# Altium PCB ee453_pcb_KangTouraj.PcbDoc (part 2 of 2)
Units mil, origin at the board's own origin, x right, y up, seen from the top; angles counter-clockwise.
Board outline 6000 x 5000 mil, 4 copper layers (Top Layer, PWR, GND, Bottom Layer), stack 53.912 mil thick; 92 components, 61 nets, 368 pads, 47 vias.
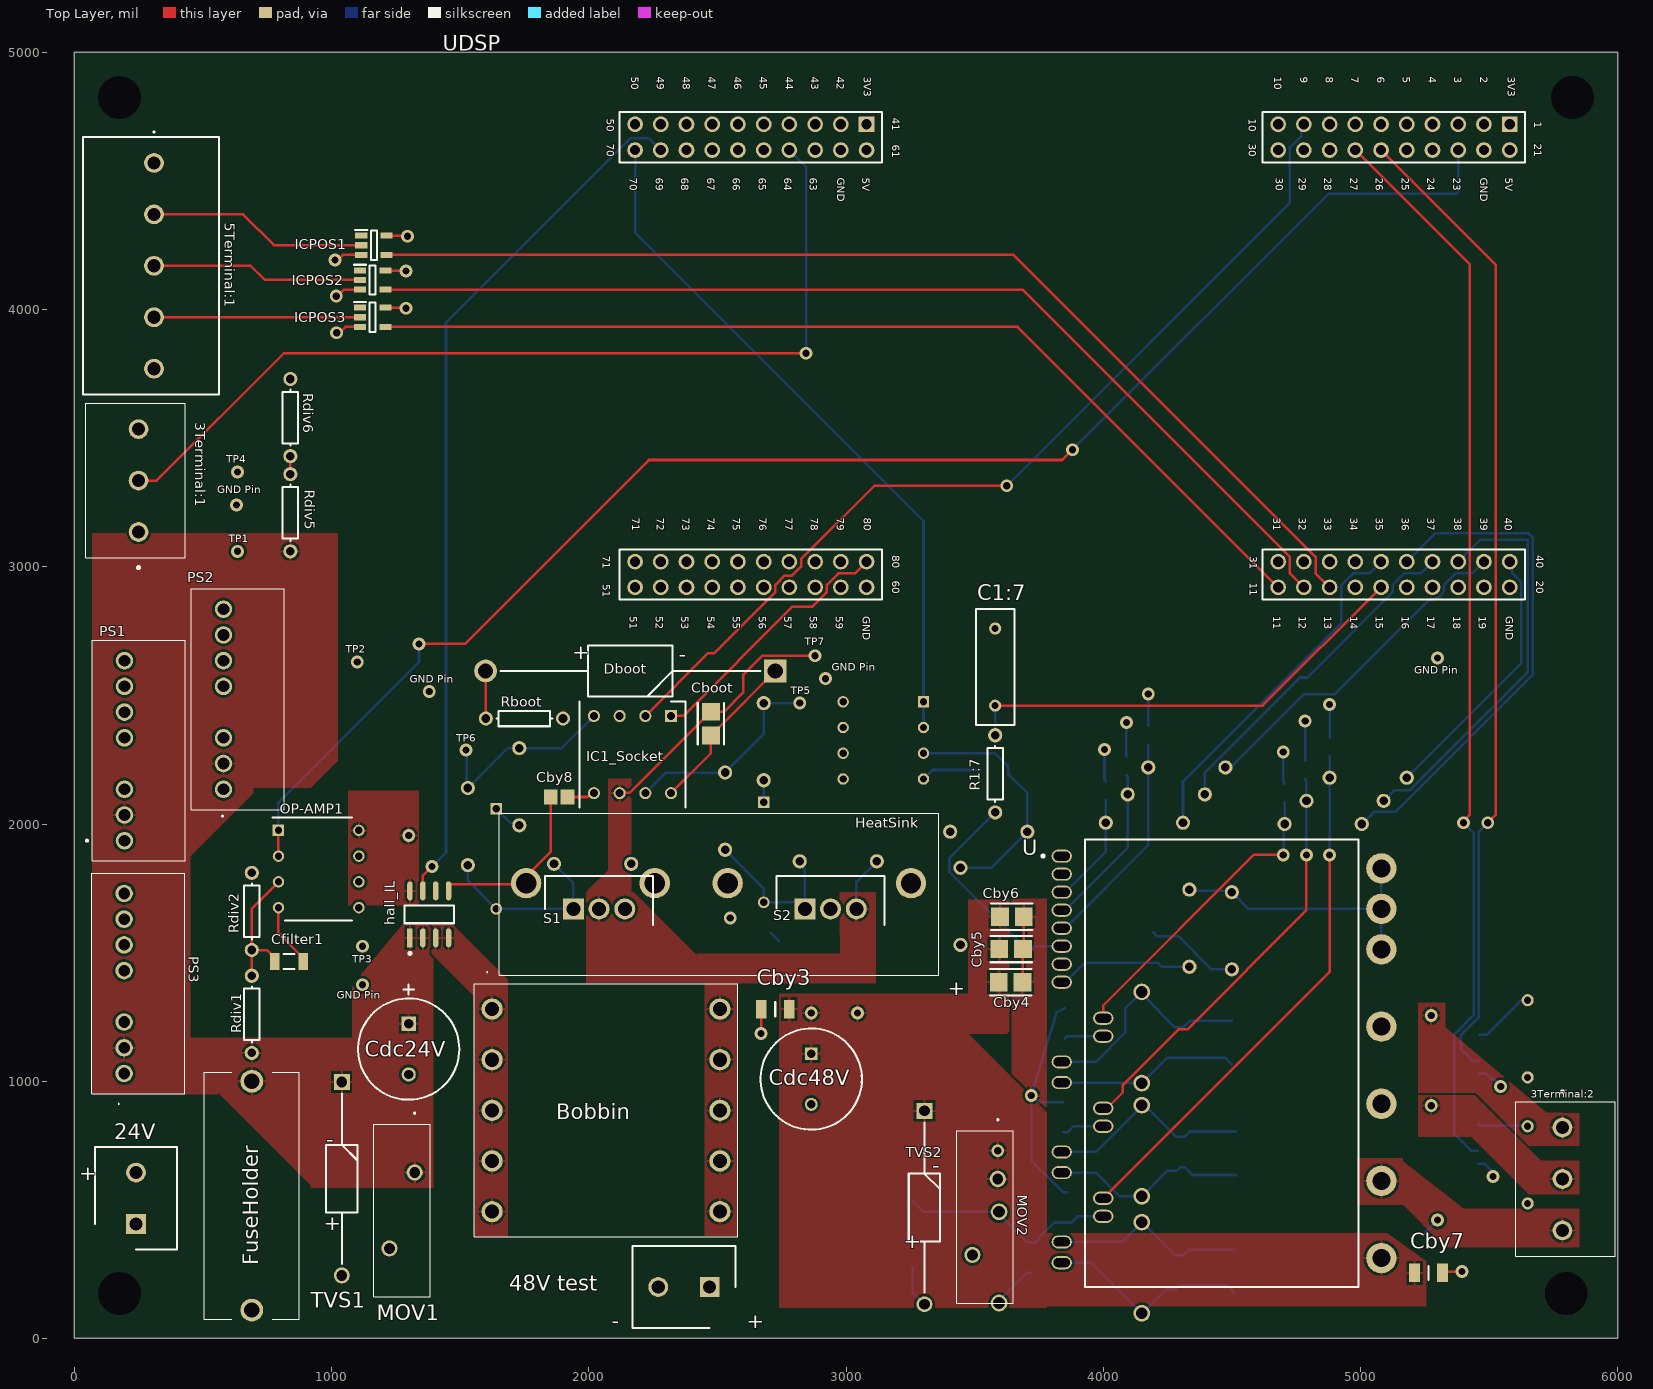
[diagram p0: Top Layer view]

## Polygon pours and split planes (outlines as drawn) (continued)
15V on PWR "15V_L02_P053" (solid, pour order 53): 260,1585 3925,1585 3925,1477.5 260,1474.99
3.3V on PWR "3.3V_L02_P105" (solid, pour order 105): 2040,4460 2040,3125 2045,3130 3625,3130 4955,4460
"Net48V test_1" on PWR "NET48V_TEST_1_L02_P029" (solid, pour order 29): 2375,275 2375,125 2740,125 2740,275
"Net48V test_1" on PWR "NET48V_TEST_1_L02_P037" (solid, pour order 37): 3390,1340 3390,1575 3500,1575 3500,1365 3475,1340
"Net48V test_1" on PWR "NET48V_TEST_1_L02_P032" (solid, pour order 32): 3475,1185 3650,1010 3650,565 3525,565 3250,840 3250,1175 3240,1185
"Net48V test_1" on PWR "NET48V_TEST_1_L02_P031" (solid, pour order 31): 3005,1340 3475,1340 3475,1185 3030,1185 3005,1210
TP7 on PWR "TP7_L02_P102" (solid, pour order 102): 2095,1375 2575,1375 2580,1380 2580,395 2095,395
NetBobbin_1 on PWR "NETBOBBIN_1_L02_P101" (solid, pour order 101): 1555,1365 2005,1365 2005,395 1555,395
NetCdc24V_1 on PWR "NETCDC24V_1_L02_P010" (solid, pour order 10): 900,680 900,1370 1400,1370 1400,680
NetCdc24V_1 on PWR "NETCDC24V_1_L02_P001" (solid, pour order 1): 575,1370 1100,1370 1100,975 1400,675 1400,590 935,590 575,945
NetCdc24V_1 on PWR "NETCDC24V_1_L02_P004" (solid, pour order 4): 575,945 75,945 70,950 70,1370 575,1370
24V on PWR "24V_L02_P100" (solid, pour order 100): 125,745 485,745 875,355 875,25 495,25 125,395 125,745
3.3V on PWR "3.3V_L02_P099" (solid, pour order 99): 2800,1915 3973.12,1915 4070,2011.88 4070,2395 3200,2395 3090,2285
15V on PWR "15V_L02_P098" (solid, pour order 98): 3925,1925 3925,1585 4070,1440 4070,1925
3.3V on PWR "3.3V_L02_P097" (solid, pour order 97): 4040,2190 4045,2185 4290,2185 4290,1690 4270,1710 4040,1710
15V on PWR "15V_L02_P096" (solid, pour order 96): 110.49,1560.49 434.29,1884.29 3790.29,1884.29 3790.29,1596.22 3774.55,1580.49
12V on PWR "12V_L02_P095" (solid, pour order 95): 1950,2900 2065,2785 2065,2150 1990,2150 1925,2215
3.3V on PWR "3.3V_L02_P093" (solid, pour order 93): 430,2945 430,2435 420,2425 270,2425 270,2960 245,2985
12V on PWR "12V_L02_P092" (solid, pour order 92): 500,2685 715,2900 1950,2900 1960,2890 1960,2425
3.3V on PWR "3.3V_L02_P058" (solid, pour order 58): 330,3250 330,2945 2030,2945 2030,4460 1145,4460 1065,4380 1065,3250
3.3V on PWR "3.3V_L02_P069" (solid, pour order 69): 4149.08,2563.04 5685,4098.96 5685,4850 5275,4850 2981.14,2556.14
3.3V on PWR "3.3V_L02_P064" (solid, pour order 64): 1355,2095 1360,2100 2760,2100 2760,2335 3025,2600 3070,2600 3070,2185 2800,1915 1355,1915
3.3V on PWR "3.3V_L02_P062" (solid, pour order 62): 1100,2095 1225,1970 1225,1915 1355,1915 1355,2095
3.3V on PWR "3.3V_L02_P061" (solid, pour order 61): 125,2385 565,2385 1025,1925 125,1925
3.3V on PWR "3.3V_L02_P060" (solid, pour order 60): 275,2385 565,2385 1025,1925 1225,1925 1225,1970 760,2435 275,2435
3.3V on PWR "3.3V_L02_P057" (solid, pour order 57): 275,2485 125,2485 125,3120 255,3250 330,3250 330,2540
3.3V on PWR "3.3V_L02_P056" (solid, pour order 56): 125,2485 275,2485 275,2385 125,2385
15V on PWR "15V_L02_P055" (solid, pour order 55): 3920,1590 4070,1440 4070,425 3930,425 3920,435
15V on PWR "15V_L02_P054" (solid, pour order 54): 3925,1580 3925,1925 3775,1925 3775,1580
15V on PWR "15V_L02_P052" (solid, pour order 52): 120,1585 275,1585 275,1475 120,1475
12V on PWR "12V_L02_P051" (solid, pour order 51): 1965,2430 1965,2250 2065,2150 2065,2060 1900,2060 1900,2065 1900,2070 1900,2335
12V on PWR "12V_L02_P050" (solid, pour order 50): 650,2685 1710,2685 1965,2430 1960,2425 1960,2335 1900,2335 1655,2580 1650,2575 650,2575
12V on PWR "12V_L02_P049" (solid, pour order 49): 500,2685 650,2685 650,2575 645,2575 500,2575
5V on PWR "5V_L02_P043" (solid, pour order 43): 950,3475 950,3315 730,3315 730,3320 730,3325 730,3475
GND on GND "GND_L03_P038" (solid, pour order 38): 5800,80 5800,4800 5825,4825 120,4825 120,80

## Silkscreen, mask and mechanical layers (free items; w line width, h text height)
Top Overlay:
  text "TP4" at 590,3405 h30
  text "GND Pin" at 555,3285 h30
  text "TP1" at 600,3095 h30
  text "TP7" at 2840,2695 h30
  text "TP2" at 1055,2665 h30
  text "+" at 1935,2640 h60
  text "-" at 2350,2630.01 h60
  text "GND Pin" at 2945,2595 h30
  text "GND Pin" at 5210,2585 h30
  text "GND Pin" at 1305,2550 h30
  text "TP5" at 2785,2505 h30
  text "TP6" at 1485,2320 h30
  text "TP3" at 1080,1460 h30
  text "+" at 3395,1335 h60
  text "GND Pin" at 1020,1320 h30
  text "-" at 980,745.01 h60
  text "-" at 3335,645.01 h60
  text "+" at 20,615 h60
  text "+" at 970,420 h60
  text "+" at 3225,350 h60
  text "-" at 2090,40.01 h60
  text "+" at 2615,40 h60
Bottom Overlay:
  text "-" at 4125,1265.01 h60
  text "+" at 4085,1005 h60
  text "-" at 4130,825.01 h60
  text "+" at 4090,570 h60
  text "-" at 3510,400.01 h60
  text "-" at 4125,370.01 h60
  text "+" at 3635,155 h60
  text "+" at 4065,120 h60

## Text inside footprints (layer, text, board x,y; h text height)
UDSP: Top Overlay "51" at 2055,2931.85 h30 r270; Top Overlay "71" at 2053.46,3042.38 h30 r270; Top Overlay "40" at 5560,3190.15 h30 r270; Top Overlay "GND" at 3065,2806.85 h30 r270; Top Overlay "3V3" at 3068.05,4904.94 h30 r270; Top Overlay "GND" at 2966.45,4511.57 h30 r270; Top Overlay "5V" at 3063.05,4511.57 h30 r270; Top Overlay "3V3" at 5573.05,4904.94 h30 r270; Top Overlay "5V" at 5563.05,4511.57 h30 r270; Top Overlay "GND" at 5466.45,4511.57 h30 r270; Top Overlay "GND" at 5565,2806.85 h30 r270; Top Overlay "40" at 5683.05,3045 h30 r270; Top Overlay "31" at 4570,3040 h30 r270; Top Overlay "11" at 4570,2937 h30 r270; Top Overlay "20" at 5683.05,2945 h30 r270; Top Overlay "21" at 5675,4645 h30 r270; Top Overlay "30" at 4565,4645 h30 r270; Top Overlay "1" at 5675,4730 h30 r270; Top Overlay "10" at 4565,4742 h30 r270; Top Overlay "71" at 2170,3190.15 h30 r270; Top Overlay "80" at 3180,3045 h30 r270; Top Overlay "60" at 3180,2945 h30 r270; Top Overlay "70" at 2070,4645 h30 r270; Top Overlay "50" at 2070,4742 h30 r270; Top Overlay "61" at 3180,4640 h30 r270; Top Overlay "41" at 3180,4745 h30 r270; Top Overlay "2" at 5465,4904.94 h30 r270; Top Overlay "3" at 5365,4904.94 h30 r270; Top Overlay "4" at 5265,4904.94 h30 r270; Top Overlay "5" at 5165,4904.94 h30 r270; Top Overlay "6" at 5065,4904.94 h30 r270; Top Overlay "7" at 4965,4904.94 h30 r270; Top Overlay "8" at 4865,4904.94 h30 r270; Top Overlay "9" at 4765,4904.94 h30 r270; Top Overlay "10" at 4665,4904.94 h30 r270; Top Overlay "23" at 5360,4511.57 h30 r270; Top Overlay "24" at 5260,4511.57 h30 r270; Top Overlay "25" at 5160,4511.57 h30 r270; Top Overlay "26" at 5060,4511.57 h30 r270; Top Overlay "28" at 4860,4511.57 h30 r270; Top Overlay "29" at 4760,4511.57 h30 r270; Top Overlay "30" at 4670,4511.57 h30 r270; Top Overlay "70" at 2160,4511.57 h30 r270; Top Overlay "69" at 2260,4511.57 h30 r270; Top Overlay "68" at 2360,4511.57 h30 r270; Top Overlay "66" at 2560,4511.57 h30 r270; Top Overlay "65" at 2660,4511.57 h30 r270; Top Overlay "64" at 2760,4511.57 h30 r270; Top Overlay "63" at 2860,4511.57 h30 r270; Top Overlay "50" at 2165,4904.94 h30 r270; Top Overlay "49" at 2265,4904.94 h30 r270; Top Overlay "48" at 2365,4904.94 h30 r270; Top Overlay "47" at 2465,4904.94 h30 r270; Top Overlay "46" at 2565,4904.94 h30 r270; Top Overlay "45" at 2665,4904.94 h30 r270; Top Overlay "44" at 2765,4904.94 h30 r270; Top Overlay "43" at 2865,4904.94 h30 r270; Top Overlay "42" at 2965,4904.94 h30 r270; Top Overlay "67" at 2460,4511.57 h30 r270; Top Overlay "54" at 2460,2806.85 h30 r270; Top Overlay "77" at 2763.66,3190.15 h30 r270; Top Overlay "76" at 2663.66,3190.15 h30 r270; Top Overlay "75" at 2560,3190.15 h30 r270; Top Overlay "74" at 2460,3190.15 h30 r270; Top Overlay "73" at 2363.66,3190.15 h30 r270; Top Overlay "72" at 2263.66,3190.15 h30 r270; Top Overlay "80" at 3068.66,3190.15 h30 r270; Top Overlay "58" at 2860,2806.85 h30 r270; Top Overlay "57" at 2760,2806.85 h30 r270; Top Overlay "56" at 2660,2806.85 h30 r270; Top Overlay "55" at 2560,2806.85 h30 r270; Top Overlay "53" at 2360,2806.85 h30 r270; Top Overlay "52" at 2260,2806.85 h30 r270; Top Overlay "51" at 2160,2806.85 h30 r270; Top Overlay "14" at 4960,2806.85 h30 r270; Top Overlay "37" at 5260,3190.15 h30 r270; Top Overlay "36" at 5160,3190.15 h30 r270; Top Overlay "35" at 5060,3190.15 h30 r270; Top Overlay "34" at 4960,3190.15 h30 r270; Top Overlay "33" at 4860,3190.15 h30 r270; Top Overlay "32" at 4760,3190.15 h30 r270; Top Overlay "31" at 4660,3190.15 h30 r270; Top Overlay "18" at 5360,2806.85 h30 r270; Top Overlay "17" at 5260,2806.85 h30 r270; Top Overlay "16" at 5160,2806.85 h30 r270; Top Overlay "15" at 5060,2806.85 h30 r270; Top Overlay "13" at 4860,2806.85 h30 r270; Top Overlay "12" at 4760,2806.85 h30 r270; Top Overlay "11" at 4660,2806.85 h30 r270; Top Overlay "59" at 2960,2806.85 h30 r270; Top Overlay "19" at 5460,2806.85 h30 r270; Top Overlay "27" at 4960,4511.57 h30 r270; Top Overlay "38" at 5365,3190.15 h30 r270; Top Overlay "39" at 5465,3190.15 h30 r270; Top Overlay "79" at 2963.66,3190.15 h30 r270; Top Overlay "78" at 2863.66,3190.15 h30 r270; Bottom Overlay "P12" at 2055,2851.88 h30 r270; Bottom Overlay "71" at 2053.46,3002.39 h30 r270; Bottom Overlay "GND" at 3063.05,2726.88 h30 r270; Bottom Overlay "GND" at 5568.05,2726.88 h30 r270; Bottom Overlay "3V3" at 5570,4824.97 h30 r270; Bottom Overlay "5V" at 5563.05,4461.59 h30 r270; Bottom Overlay "GND" at 5465,4431.6 h30 r270; Bottom Overlay "3V3" at 3070,4824.97 h30 r270; Bottom Overlay "5V" at 3063.05,4461.59 h30 r270; Bottom Overlay "GND" at 2965,4431.6 h30 r270; Bottom Overlay "1" at 5675,4715 h30 r270; Bottom Overlay "21" at 5675,4605 h30 r270; Bottom Overlay "10" at 4565,4700 h30 r270; Bottom Overlay "30" at 4565,4590 h30 r270; Bottom Overlay "20" at 5683.05,2895 h30 r270; Bottom Overlay "40" at 5683.05,2990 h30 r270; Bottom Overlay "11" at 4570,2900 h30 r270; Bottom Overlay "31" at 4570,3000 h30 r270; Bottom Overlay "70" at 2070,4600 h30 r270; Bottom Overlay "50" at 2070,4700 h30 r270; Bottom Overlay "61" at 3180,4600 h30 r270; Bottom Overlay "41" at 3180,4690 h30 r270; Bottom Overlay "71" at 2170,3150.16 h30 r270; Bottom Overlay "80" at 3180,3000 h30 r270; Bottom Overlay "60" at 3180,2890 h30 r270; Bottom Overlay "P57" at 5460,2726.88 h30 r270; Bottom Overlay "NC" at 5365,2756.87 h30 r270; Bottom Overlay "NC" at 5260,2756.87 h30 r270; Bottom Overlay "XRSn" at 5160,2726.88 h30 r270; Bottom Overlay "P16" at 5060,2726.88 h30 r270; Bottom Overlay "P17" at 4960,2726.88 h30 r270; Bottom Overlay "P39" at 4860,2726.88 h30 r270; Bottom Overlay "P23" at 4760,2726.88 h30 r270; Bottom Overlay "P59" at 4660,2726.88 h30 r270; Bottom Overlay "P10" at 5560,3115.17 h30 r270; Bottom Overlay "P11" at 5465,3125.17 h30 r270; Bottom Overlay "P08" at 5365,3110.17 h30 r270; Bottom Overlay "P09" at 5260,3110.17 h30 r270; Bottom Overlay "P04" at 5160,3110.17 h30 r270; Bottom Overlay "P05" at 5060,3110.17 h30 r270; Bottom Overlay "P58" at 4960,3110.17 h30 r270; Bottom Overlay "P30" at 4860,3110.17 h30 r270; Bottom Overlay "P18" at 4760,3115.17 h30 r270; Bottom Overlay "P25" at 4660,3110.17 h30 r270; Bottom Overlay "P14" at 2263.66,3115.17 h30 r270; Bottom Overlay "P15" at 2363.66,3115.17 h30 r270; Bottom Overlay "P26" at 2463.66,3110.17 h30 r270; Bottom Overlay "P03" at 2563.66,3110.17 h30 r270; Bottom Overlay "P02" at 2663.66,3110.17 h30 r270; Bottom Overlay "P07" at 2758.66,3110.17 h30 r270; Bottom Overlay "P06" at 2863.66,3110.17 h30 r270; Bottom Overlay "P01" at 2963.66,3120.17 h30 r270; Bottom Overlay "P00" at 3068.66,3110.17 h30 r270; Bottom Overlay "P12" at 2160,2726.88 h30 r270; Bottom Overlay "P34" at 2260,2726.88 h30 r270; Bottom Overlay "P33" at 2360,2726.88 h30 r270; Bottom Overlay "P31" at 2460,2726.88 h30 r270; Bottom Overlay "P24" at 2560,2726.88 h30 r270; Bottom Overlay "XRSn" at 2660,2726.88 h30 r270; Bottom Overlay "NC" at 2760,2756.87 h30 r270; Bottom Overlay "NC" at 2860,2756.87 h30 r270; Bottom Overlay "P27" at 2960,2726.88 h30 r270; Bottom Overlay "AA6" at 2860,4431.6 h30 r270; Bottom Overlay "AC1" at 2560,4441.6 h30 r270; Bottom Overlay "AA0/DACA" at 2110,4281.65 h30 r270; Bottom Overlay "PGAGND" at 2960,4795 h30 r270; Bottom Overlay "P28" at 2865,4824.97 h30 r270; Bottom Overlay "P29" at 2765,4824.97 h30 r270; Bottom Overlay "P22" at 2465,4824.97 h30 r270; Bottom Overlay "NC" at 2265,4854.96 h30 r270; Bottom Overlay "NC" at 2165,4854.96 h30 r270; Bottom Overlay "P35" at 4665,4824.97 h30 r270; Bottom Overlay "P37" at 4765,4824.97 h30 r270; Bottom Overlay "P56" at 4965,4824.97 h30 r270; Bottom Overlay "P40" at 5265,4824.97 h30 r270; Bottom Overlay "P13" at 5365,4829.97 h30 r270; Bottom Overlay "PGAGND" at 5460,4795 h30 r270; Bottom Overlay "AB1" at 5060,4441.6 h30 r270; Bottom Overlay "AC2" at 5160,4431.6 h30 r270; Bottom Overlay "AB0" at 5260,4431.6 h30 r270; Bottom Overlay "AA5" at 5360,4431.6 h30 r270; Bottom Overlay "NC" at 5165,4854.96 h30 r270; Bottom Overlay "AB3" at 5065,4824.97 h30 r270; Bottom Overlay "AC4" at 4865,4824.97 h30 r270; Bottom Overlay "AB4/G4O" at 2670,4799.33 h25 r270; Bottom Overlay "AA4/G2O" at 2565,4799.33 h25 r270; Bottom Overlay "AA8/G6O" at 2365,4799.33 h25 r270; Bottom Overlay "AA1/DACB" at 4610,4330 h30 r270; Bottom Overlay "AA9/G5I" at 4770,4354.29 h25 r270; Bottom Overlay "AC0/G3I" at 4865,4354.29 h25 r270; Bottom Overlay "AB2/G1I" at 4970,4358.46 h25 r270